# Altium PCB PCB.PcbDoc
Units mm, origin at the board's own origin, x right, y up, seen from the top; angles counter-clockwise.
Board outline 43.27 x 61.47 mm, 2 copper layers (Top Layer, Bottom Layer); 11 components, 8 nets, 24 pads, 0 vias.
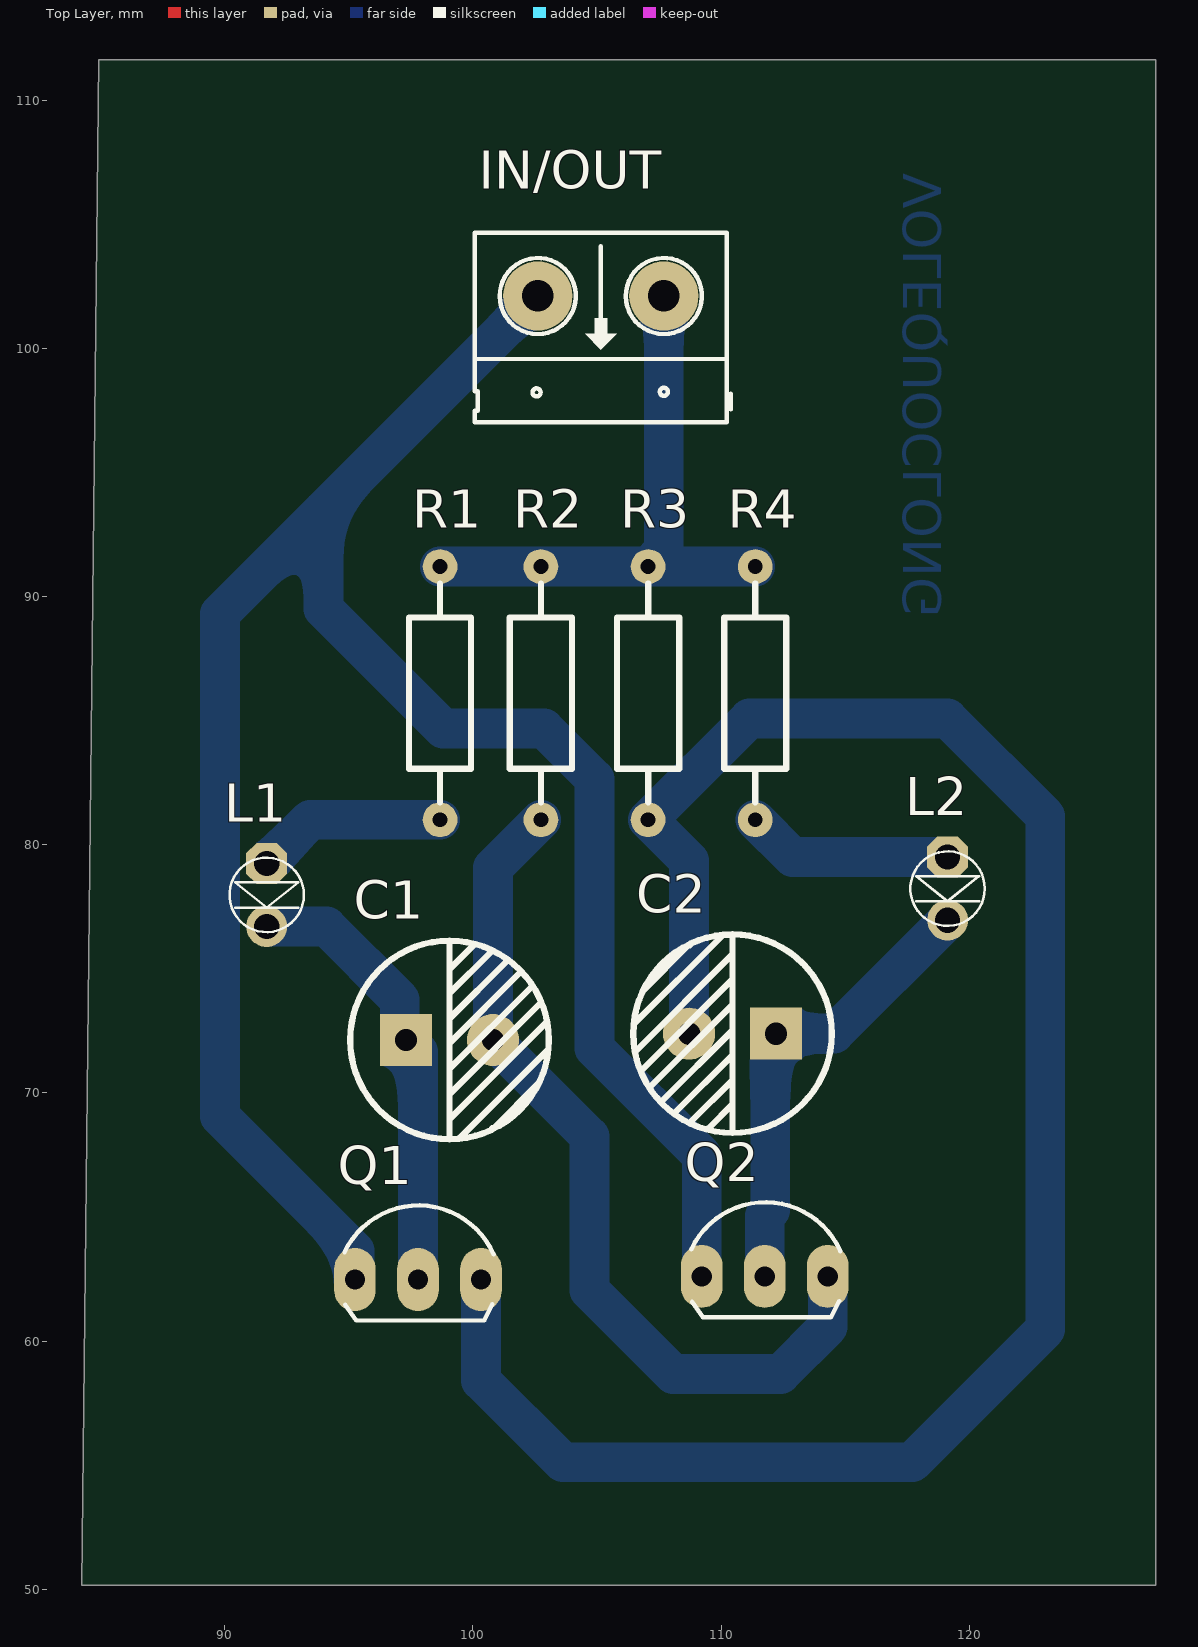
[diagram p0: Top Layer view]
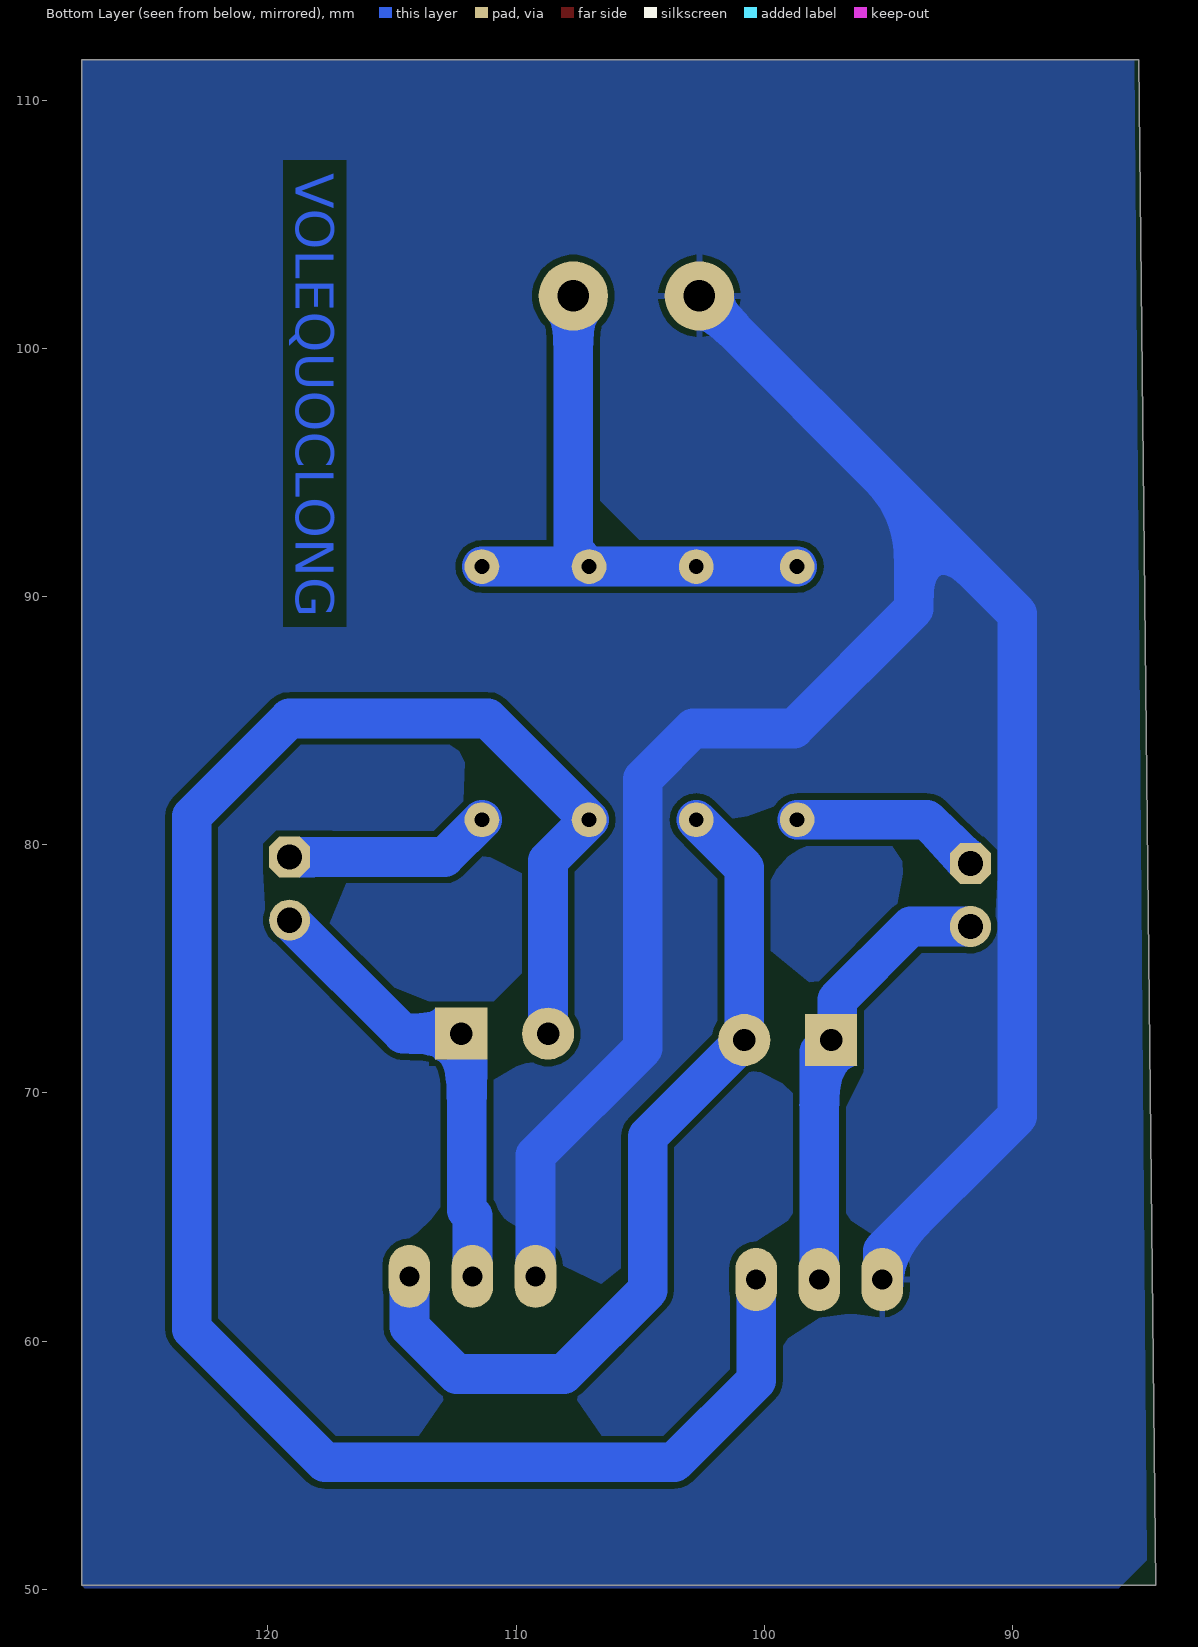
[diagram p1: Bottom Layer view, seen from below]
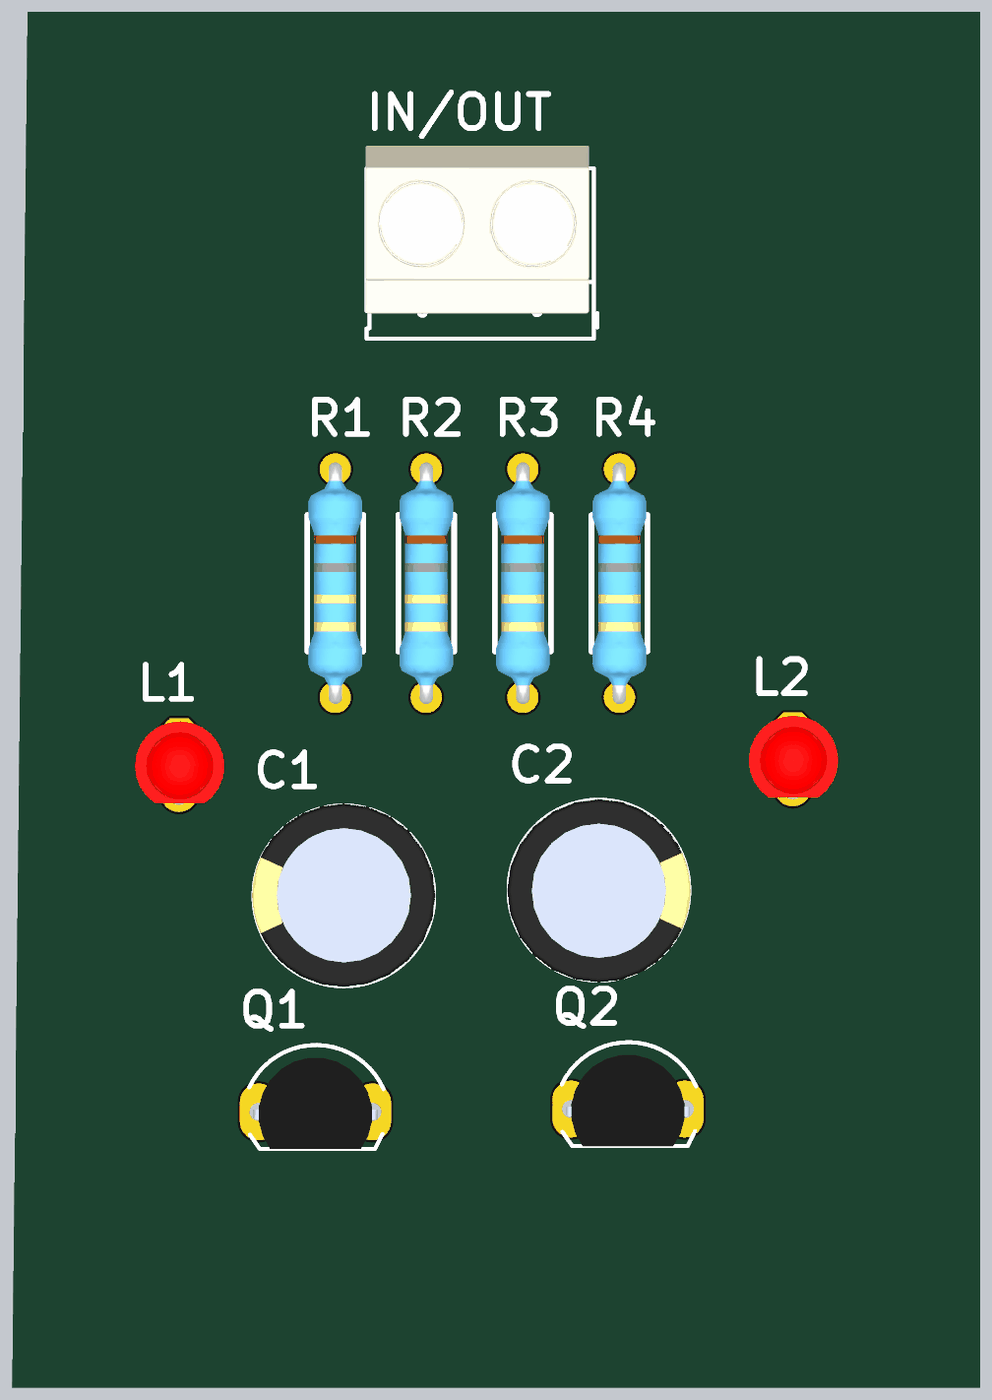
[diagram p2: 3D render of the assembled board from above, using the file's embedded part models]

## Layer stack, top to bottom
Top Solder: solder mask 0.0102, Solder Resist, Dk 3.5
Top Layer: signal copper 0.0356
Dielectric 1: dielectric 0.32, FR-4, Dk 4.8
Bottom Layer: signal copper 0.0356
Bottom Solder: solder mask 0.0102, Solder Resist, Dk 3.5

## Board outline
84.922,111.633 127.508,111.633 127.508,50.165 84.236,50.165

## Design rules (kind name [scope] priority, off if disabled: settings)
Clearance [All] p1: gap=0.254 ignorepadtopadclearanceinfootprint=FALSE
PolygonConnect [All] p1: connectstyle=Relief reliefconductorwidth=0.254 reliefentries=4 polygonreliefangle="90 Angle" airgapwidth=0.254
RoutingVias [All] p1: holewidth=0.711 width=1.27 viastyle="Through Hole" minholewidth=0.711 minwidth=1.27 maxholewidth=0.711 maxwidth=1.27
SolderMaskExpansion [All] p1: expansion=0.102 istentingtop=FALSE
SupplyNets "Schematic Supply Nets_1" [InNet('GND')] p1: voltage=0.000
SupplyNets "Schematic Supply Nets" [InNet('VCC')] p2: voltage=0.000
Width [All] p1: maxlimit=1.6 minlimit=1.6 preferedwidth=1.6
30 further rules are at their usual default settings.

## Components (designator, comment, footprint, x,y, rotation, side; value= is the part's Value field where it differs from the comment)
C1 "4.7uF" "tu hoa 8mm" 99.06,72.136 r0 top
C2 "4.7uF" "tu hoa 8mm" 110.462,72.39 r180 top
IN/OUT "Header 2" HED2 107.696,102.108 r180 top
L1 "LED 3mm" LED-3MM-RED 91.694,79.248 r270 top
L2 "LED 3mm" LED-3MM-RED 119.126,79.502 r270 top
Q1 "C1815" QTO-92 97.79,62.484 r0 top
Q2 "C1815" QTO-92 111.76,62.611 r0 top
R1 "1k" "tro vach 1/4w" 98.679,86.106 r90 top
R2 "100k" "tro vach 1/4w" 102.743,86.106 r90 top
R3 "100k" "tro vach 1/4w" 107.061,86.106 r90 top
R4 "1k" "tro vach 1/4w" 111.379,86.106 r90 top

## Footprints (in the part's own frame and the unit in brackets; to place one, negate y for a bottom-side part, rotate by r counter-clockwise, add the part's x,y. Pads: shape width x height; smd on the part's side, far side on the other; paste and mask are expansions set on the pad)
HED2 [mil] "Header 2, 2 pin, hight 300mil, Pin to Pin 200, Colour Green"
  round 110 hole 50: 1(0,0) 2(200,0)
  silkscreen extent -106,-100 300,200, body extent -92,-140 302,155, height 394
LED-3MM-RED [mil]
  oct 65x65 hole 40: 1(0,0)
  round 65 hole 40: 2(100,0)
  silkscreen extent -9,-59 109,59, body extent -27,-77 117,80, height 181
QTO-92 [mil] "TO-92"
  oval 66x100 hole 32: 1(-100,0) 2(0,0) 3(100,0)
  silkscreen extent -117,-65 120,118, body extent -109,-66 109,95, height 245
"tro vach 1/4w" [mm]
  round 1.4 hole 0.6: 1(-5.1,0) 2(5.1,0)
  silkscreen extent -4.39,-1.25 4.42,1.25, body extent -5.38,-1.2 5.38,1.2, height 2.41
"tu hoa 8mm" [mm]
  rect 2.1x2.1 hole 0.9: 1(-1.75,0)
  round 2.1 hole 0.9: 2(1.75,0)
  silkscreen extent -4,-4 4,4, body extent -4.1,-4.07 4.1,4.13, height 13.81

## Part data
C1 C2: library part "Tu Hoa 4.7uF 400V 8x12", "Cắm", Chung_Loai=Cắm, Don_Vi=Con, Ma_Hang=MH003744, So_Chan=2, Ten_Linh_Kien="Tụ Hóa 4.7uF 400V 8x12MM"
IN/OUT: library part Hed2, "Header 2 (Green)"
L1 L2: library part "LED 3mm Do", "Cắm", Chung_Loai=Cắm, Don_Vi=Con, Ma_Hang=MH003892, Ten_Linh_Kien="Led 3MM Phủ Đỏ (10c)"
Q1 Q2: "NPN 600mW, ECB"
R1 R4: library part "Tro Vach 1/4W 5% 1k", "Cắm", Chung_Loai=Cắm, Don_Vi=Con, Ma_Hang=MH007390, So_Chan=2, Ten_Linh_Kien="Trở Vạch 1/4w 5% 1k"
R2 R3: library part "Tro Vach 1/4W 5% 100k", "Cắm", Chung_Loai=Cắm, Don_Vi=Con, Ma_Hang=MH007352, So_Chan=2, Ten_Linh_Kien="Trở Vạch 1/4w 5% 100k"

## Nets (pads, with @x,y where several pads share a name; then routed paths per layer and width w, separated by ;. In a path a pad name is that pad's centre, name@x,y a point inside that pad or via, vN(x,y) a via of type N, cw(c..) or ccw(c..) an arc to the next point about the centre after c; other vN are vias at no path point)
GND: IN/OUT.2 Q1.1 Q2.1 | length 86.7
  Bottom Layer w1.6: Q1.1 95.235,62.499 95.235,63.642 89.814,69.063 89.814,89.306 93.98,93.472 ; IN/OUT.2 93.98,93.472 ; Q2.1 109.22,67.488 104.902,71.806 104.902,82.652 102.87,84.684 98.806,84.684 93.98,89.51 93.98,93.472
NetC1_1: C1.1 L1.2 Q1.2 | length 18.2
  Bottom Layer w1.6: L1.2 94.107,76.708 97.06,73.755 97.06,72.386 C1.1 97.56,71.927 97.79,71.656 Q1.2
NetC1_2: C1.2 Q2.3 R2.1 | length 35.2
  Bottom Layer w1.6: R2.1 100.81,79.073 C1.2 104.699,68.247 104.699,62.052 108.077,58.674 112.395,58.674 114.3,60.579 Q2.3
NetC2_1: C2.1 L2.2 Q2.2 | length 18.8
  Bottom Layer w1.6: Q2.2 111.76,65.049 111.986,65.275 111.986,72.164 C2.1 114.554,72.39 L2.2
NetC2_2: C2.2 Q1.3 R3.1 | length 79.7
  Bottom Layer w1.6: Q1.3 100.33,58.42 103.632,55.118 117.704,55.118 123.063,60.477 123.063,81.153 119.126,85.09 111.145,85.09 R3.1 108.712,79.355 C2.2
NetL1_1: L1.1 R1.1 | length 7.7
  Bottom Layer w1.6: L1.1 93.452,81.006 R1.1
NetL2_1: L2.1 R4.1 | length 8.4
  Bottom Layer w1.6: R4.1 112.883,79.502 L2.1
VCC: IN/OUT.1 R1.2 R2.2 R3.2 R4.2 | length 23.9
  Bottom Layer w1.6: R1.2 R2.2 R3.2 ; IN/OUT.1 107.696,91.841 R3.2 ; R4.2 R3.2

## Polygon pours and split planes (outlines as drawn)
GND on Bottom Layer "GND_L02_P000" (solid, pour order 0): 85.09,111.633 127.508,111.633 127.508,50.165 127.381,50.038 84.582,50.038

## Other copper
Bottom Layer:
  text "VOLEQUOCLONG" at 118.872,107.061 h1.52 r90